# EAGLE board mosfetdriver_relay_boost (EAGLE 9.3.0)
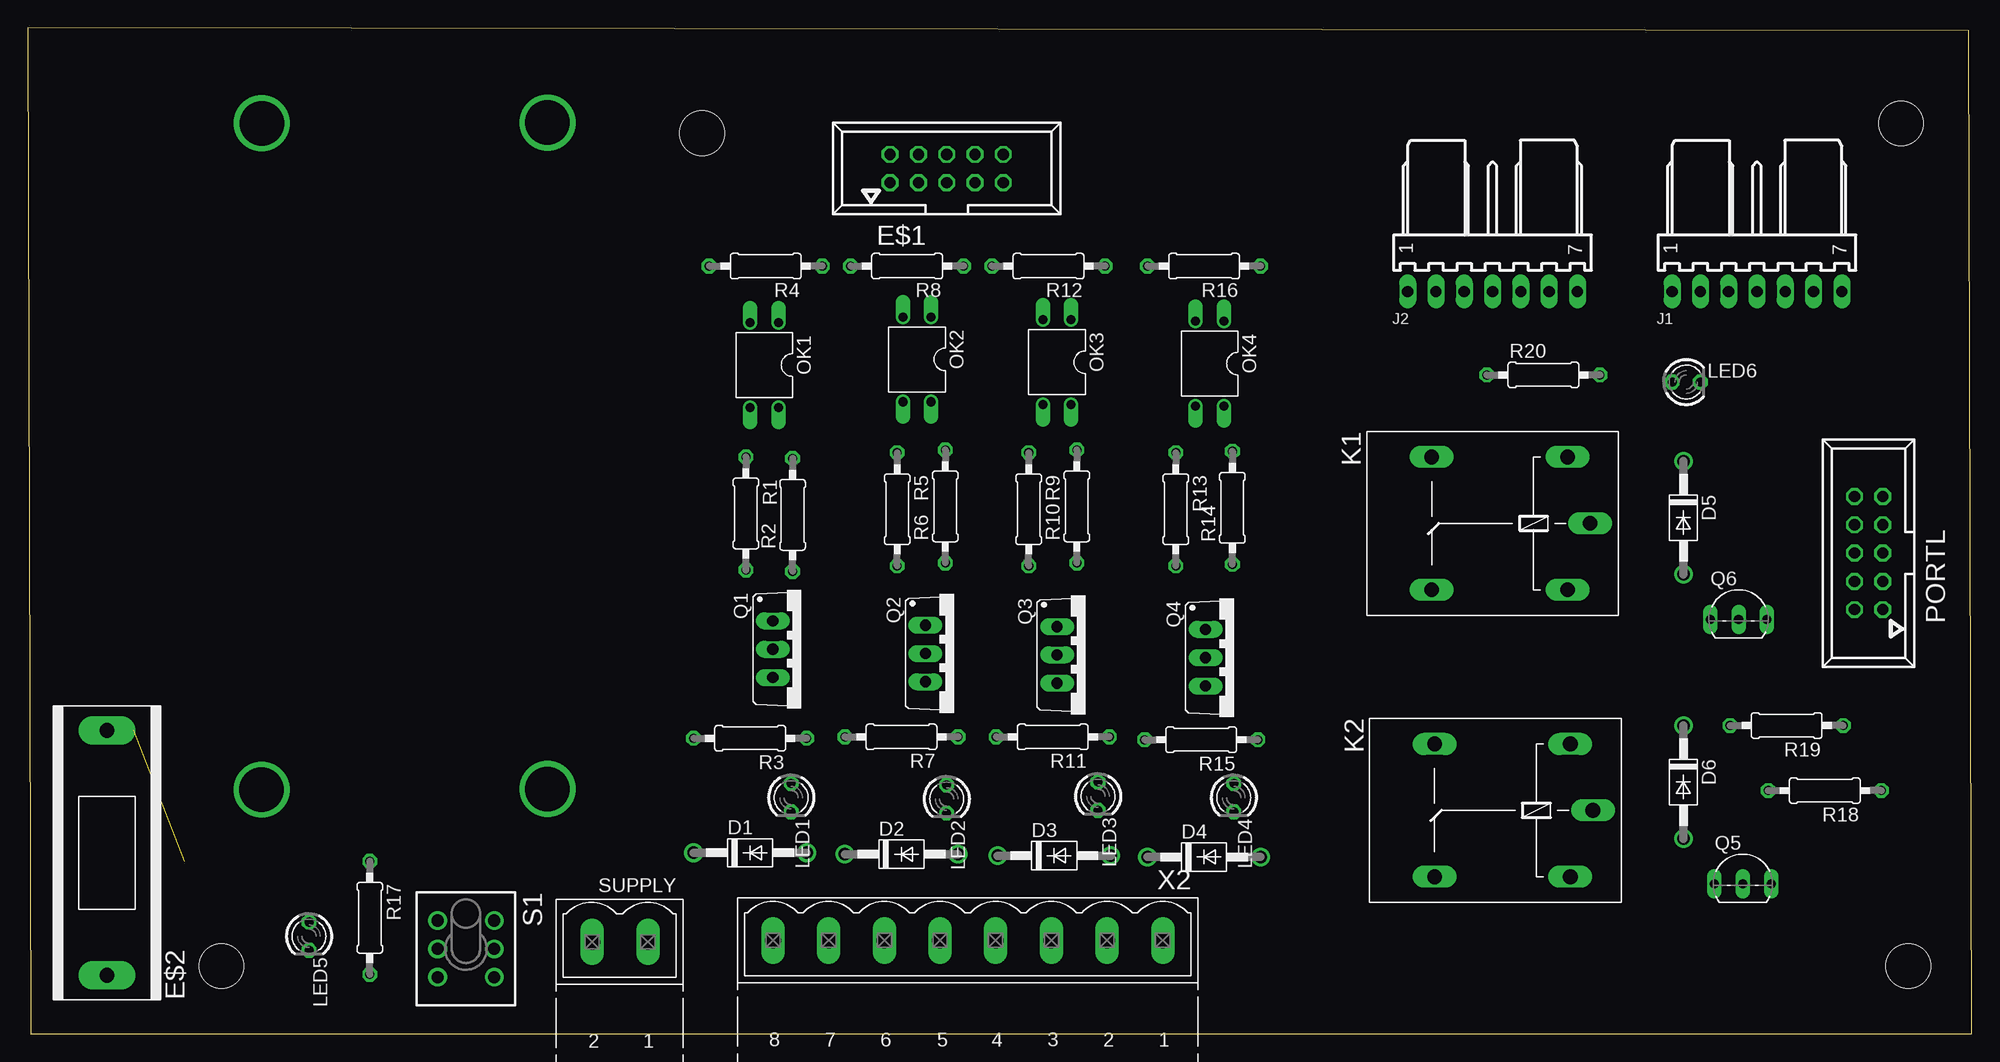
[diagram p0: board, top side]
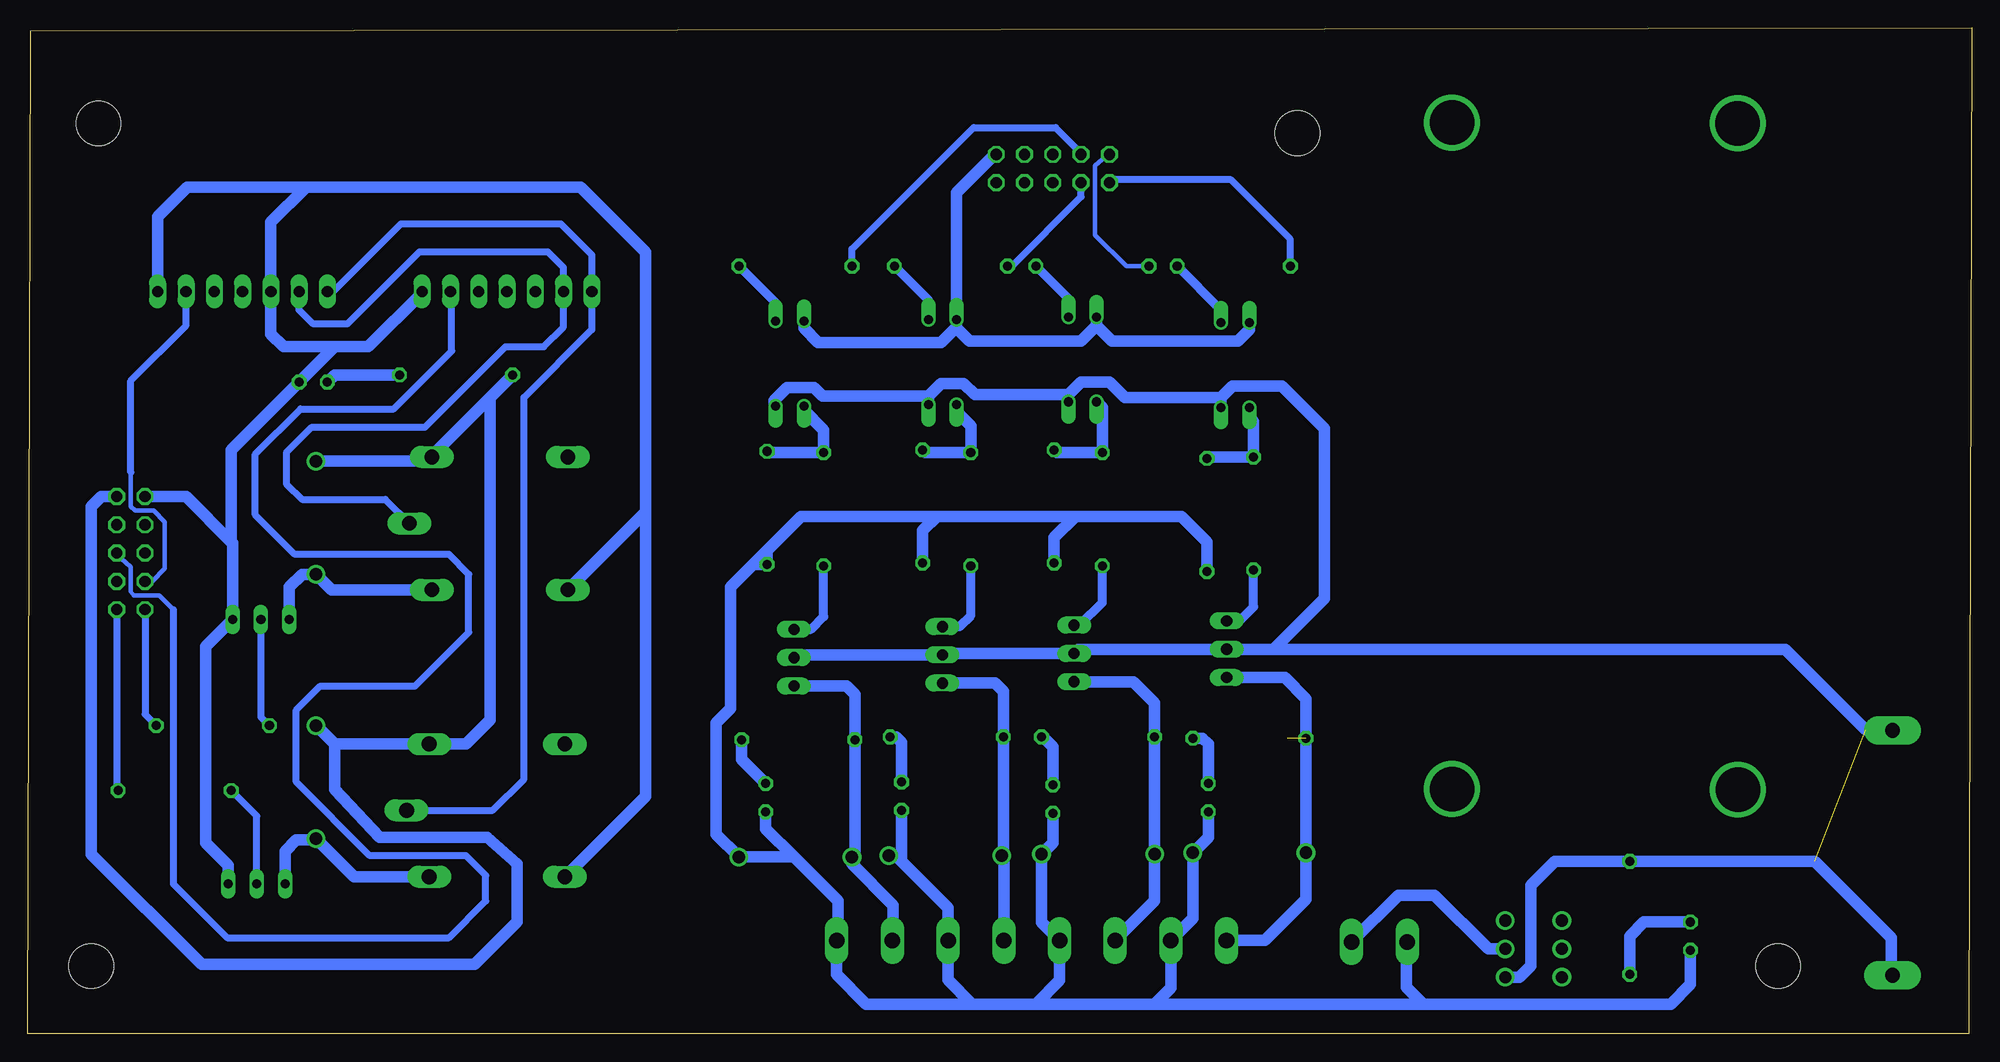
[diagram p1: board, bottom side, seen from below]

Size 174.58 x 90.36 mm. Coordinates in mm from the lower left corner, seen from the top.
Outline: 0.25,0.02 174.58,0 174.33,90.09 0,90.36 0.25,0.02
Copper layers (1*16): Top 0.035mm / dielectric 1.5mm / Bottom 0.035mm
Design rules "default *": minimum track width 10mil, minimum drill 24mil, track to track 8mil, track to pad 8mil, pad to pad 8mil, via to via 8mil, smd to smd 8mil, copper to edge 40mil, drill to drill 8mil, minimum pad ring 10mil, minimum via ring 8mil, stop-mask expansion 10mil, vias tented up to drill 0mil, thermal gap 10mil
Holes 4 mm at 168.25,81.79 168.89,6.1 17.38,6.1 60.56,80.9

## Footprints (pad centres in the part's own frame; a part is rotated, then mirrored left to right if it is on the bottom)
DO41-10 = drill 1.118: A 5.08,0; C -5.08,0
057-010-1 = drill 1 octagon: 1 -5.08,-1.27; 2 -5.08,1.27; 3 -2.54,-1.27; 4 -2.54,1.27; 5 0,-1.27; 6 0,1.27; 7 2.54,-1.27; 8 2.54,1.27; 9 5.08,-1.27; 10 5.08,1.27
SH22 = drill 1.321 pad 2.54 long: 1 -10.998,0; 2 10.998,0
7395-07 = drill 1.016 long: 1 7.62,0; 2 5.08,0; 3 2.54,0; 4 0,0; 5 -2.54,0; 6 -5.08,0; 7 -7.62,0
G5LE = drill 1.321 long: 1 -7.493,-5.969; 2 -7.493,5.969; O 4.699,5.969; P -9.525,0; S 4.699,-5.969
LED3MM = drill 0.813 octagon: A -1.27,0; K 1.27,0
DIL04 = drill 0.813 offset: 1 -1.27,-3.81; 2 1.27,-3.81; 3 1.27,3.81; 4 -1.27,3.81
TO220BV = drill 1.016 long: D 0,-2.54; G -2.54,-2.54; S 2.54,-2.54
TO92-EBC = drill 0.813 long: B 0,-1.27; C -2.54,-1.27; E 2.54,-1.27
0207/10 = drill 0.813 octagon: 1 -5.08,0; 2 5.08,0
TL4XPO = drill 1.1 pad 1.676: 1 -2.54,2.54; 2 0,2.54; 3 2.54,2.54; 4 -2.54,-2.54; 5 0,-2.54; 6 2.54,-2.54
MSTBV2 = drill 1.397 long: 1 -2.5,0; 2 2.5,0
MSTBV8 = drill 1.397 long: 1 -17.501,0; 2 -12.497,0; 3 -7.493,0; 4 -2.489,0; 5 2.515,0; 6 7.493,0; 7 12.497,0; 8 17.501,0

## Placement (x,y rotation side)
D1  1N4004  [DO41-10]  64.87,16.26 0 top
D2  1N4004  [DO41-10]  78.46,16.13 0 top
D3  1N4004  [DO41-10]  92.18,16 0 top
D4  1N4004  [DO41-10]  105.64,15.88 0 top
D5  1N4004  [DO41-10]  148.69,46.36 270 top
D6  1N4004  [DO41-10]  148.69,22.61 270 top
E$1  [057-010-1]  82.53,77.72 0 top
E$2  [SH22]  7.11,16.25 90 top
J1  22-05-7078-07  [7395-07]  155.3,66.67 180 top
J2  22-05-7078-07  [7395-07]  131.55,66.67 180 top
K1  G5L  [G5LE]  130.79,45.85 180 top
K2  G5L  [G5LE]  131.04,20.07 180 top
LED1  [LED3MM]  68.56,21.21 270 top
LED2  [LED3MM]  82.53,21.08 270 top
LED3  [LED3MM]  96.12,21.34 270 top
LED4  [LED3MM]  108.31,21.21 270 top
LED5  [LED3MM]  25.25,8.76 270 top
LED6  [LED3MM]  148.95,58.55 0 top
OK1  PC817  [DIL04]  66.14,60.07 180 top
OK2  PC817  [DIL04]  79.86,60.58 180 top
OK3  PC817  [DIL04]  92.43,60.33 180 top
OK4  PC817  [DIL04]  106.15,60.2 180 top
PORTL  057-010-1  [057-010-1]  165.33,43.18 90 top
Q1  IRF540  [TO220BV]  69.45,34.54 270 top
Q2  IRF540  [TO220BV]  83.16,34.16 270 top
Q3  IRF540  [TO220BV]  94.97,34.04 270 top
Q4  IRF540  [TO220BV]  108.31,33.78 270 top
Q5  BC548  [TO92-EBC]  154.03,14.73 0 top
Q6  BC548  [TO92-EBC]  153.65,38.48 0 top
R1  100  [0207/10]  64.49,46.74 270 top
R2  10k  [0207/10]  68.68,46.61 90 top
R3  1k  [0207/10]  64.87,26.54 180 top
R4  220  [0207/10]  66.27,68.96 180 top
R5  100  [0207/10]  78.08,47.12 270 top
R6  10k  [0207/10]  82.4,47.37 90 top
R7  1k  [0207/10]  78.46,26.67 180 top
R8  220  [0207/10]  78.97,68.96 180 top
R9  100  [0207/10]  89.89,47.12 270 top
R10  10k  [0207/10]  94.21,47.37 90 top
R11  1k  [0207/10]  92.05,26.67 180 top
R12  220  [0207/10]  91.67,68.96 180 top
R13  100  [0207/10]  103.1,47.12 270 top
R14  10k  [0207/10]  108.18,47.24 90 top
R15  1k  [0207/10]  105.39,26.42 180 top
R16  220  [0207/10]  105.64,68.96 180 top
R17  [0207/10]  30.71,10.41 270 top
R18  [0207/10]  161.39,21.84 180 top
R19  [0207/10]  157.97,27.69 180 top
R20  [0207/10]  136.12,59.18 0 top
S1  TL46PO  [TL4XPO]  39.35,7.62 270 top
SUPPLY  [MSTBV2]  53.19,8.26 180 top
X2  [MSTBV8]  84.43,8.38 180 top

## Library data of the parts
D1-D6 = diode
E$1 = con-panduit
E$2 = fuse
J1 J2 = con-molex; OC_FARNELL: unknown; OC_NEWARK: unknown
K1 K2 = relay; OC_FARNELL: unknown; OC_NEWARK: unknown
LED1-LED6 = led
OK1-OK4 = optocoupler; MPN: PC817X4J000F; OC_FARNELL: 9707727; OC_NEWARK: 97K7059
PORTL = con-panduit; OC_FARNELL: unknown; OC_NEWARK: unknown
Q1-Q4 = transistor-power
Q5 Q6 = transistor-npn
R1-R17 = rcl
R18-R20 = rcl; SPICEPREFIX: R
S1 = switch
SUPPLY X2 = con-phoenix-500; OC_FARNELL: unknown; OC_NEWARK: unknown

## Nets
12V: D5.C D6.C K1.1 K2.1 PORTL.9 R20.1
+12V: OK1.4 OK2.4 OK3.4 OK4.4 Q1.D Q2.D Q3.D Q4.D R17.1 S1.3
BRK: J1.1 J2.1 K2.P
DIR2: J2.3
EN: J1.2 J2.2 K1.P
GND: D1.A D2.A D3.A D4.A LED1.K LED2.K LED3.K LED4.K LED5.K R2.1 R6.1 R10.1 R14.1 SUPPLY.2 X2.1 X2.3 X2.5 X2.7
GND1: OK1.2 OK2.2 OK3.2 OK4.2
GND2: J1.3 J1.7 J2.7 K1.O K2.O LED6.K PORTL.10 Q5.E Q6.E
IN1: R4.2
IN2: R8.2
IN3: R12.2
IN4: R16.2
N$1: OK3.1 R12.1
N$2: OK1.3 R1.1 R2.2
N$3: Q1.G R1.2
N$4: PORTL.7
N$5: LED1.A R3.1
N$6: OK4.1 R16.1
N$7: OK2.3 R5.1 R6.2
N$8: Q2.G R5.2
N$9: Q6.B R19.2
N$10: LED2.A R7.1
N$11: OK2.1 R8.1
N$12: OK3.3 R9.1 R10.2
N$13: Q3.G R9.2
N$14: Q5.B R18.2
N$15: LED3.A R11.1
N$16: OK1.1 R4.1
N$17: OK4.3 R13.1 R14.2
N$18: Q4.G R13.2
N$19: D5.A K1.2 Q6.C
N$20: LED4.A R15.1
N$21: S1.2 SUPPLY.1
N$22: D6.A K2.2 Q5.C
N$23: LED5.A R17.2
N$24: LED6.A R20.2
OP1: D1.C Q1.S R3.2 X2.8
OP2: D2.C Q2.S R7.2 X2.6
OP3: D3.C Q3.S R11.2 X2.4
OP4: D4.C Q4.S R15.2 X2.2
P0: PORTL.1 R18.1
P1: PORTL.2 R19.1
PWM1: J1.6 PORTL.4
PWM3: J2.6 PORTL.5

## Tracks (layer width: path | path; a pad name or v marks a point on that pad's centre or on a via)
12V
  Bottom 1.016: K1.1 138.28,51.94 | 138.28,51.94 133.07,57.15 | 133.07,57.15 R20.1 | 133.07,57.15 133.07,28.19 135.23,26.04 K2.1 147.04,26.04 | D5.C 138.79,51.44 138.28,51.94 | 147.04,26.04 D6.C | 147.04,26.04 147.04,21.97 142.98,17.65 133.33,17.65 130.66,15.24 130.66,10.03 134.47,6.22 158.98,6.22 168.89,16.13 168.89,47.37 168,48.26 PORTL.9
+12V  (1 unrouted)
  Bottom 1.016: 62.72,34.54 58.14,39.12 58.14,54.36 61.95,58.17 66.4,58.17 67.41,57.15 | 62.72,34.54 Q1.D 80.24,34.54 Q2.D 92.31,34.16 Q3.D 105.51,34.04 Q4.D | 67.41,57.15 OK1.4 | 67.41,57.15 76.05,57.15 77.45,58.55 79.99,58.55 81.13,57.4 | 81.13,57.4 OK2.4 | 81.13,57.4 89.51,57.4 90.53,58.42 92.56,58.42 93.7,57.28 | OK3.4 93.7,57.28 | 93.7,57.28 103.23,57.28 103.99,58.04 106.4,58.04 107.55,56.9 107.55,56.52 OK4.4 | S1.3 40.62,5.08 39.6,6.1 39.6,13.33 37.44,15.49 R17.1 14.07,15.49 9.5,10.92 9.5,10.91 7.67,9.08 7.67,9.06 7.22,8.61 7.22,5.29 7.11,5.18 | 62.72,34.54 16.74,34.54 9.5,27.3 7.2,27.3 7,27.11
BRK
  Bottom 0.61: K2.P 132.82,20.07 130.03,22.86 130.03,57.15 123.93,63.25 J2.1 123.93,69.98 126.72,72.77 141.07,72.77 147.17,66.67 J1.1
EN
  Bottom 0.61: K1.P 142.47,48.01 149.96,48.01 151.36,49.4 151.36,52.2 149.07,54.48 138.91,54.48 131.68,61.72 128.25,61.72 126.47,63.5 J2.2 126.47,68.83 127.87,70.23 139.42,70.23 145.9,63.75 148.95,63.75 150.22,65.02 J1.2
GND
  Bottom 1.016: D3.A 96.62,16 96.12,15.49 | 96.12,15.49 91.93,11.3 X2.3 91.93,4.83 89.77,2.67 | 105.77,15.88 D4.A 112.75,17.91 112.75,27.94 111.48,29.21 111.48,40.13 109.45,42.16 | 105.77,15.88 101.83,11.94 101.83,8.48 X2.1 101.96,8.36 101.96,5.33 99.29,2.67 89.77,2.67 | LED4.K 108.31,18.41 105.77,15.88 | LED3.K 96.12,15.49 | LED2.K 82.53,17.15 D2.A 83.54,10.01 X2.5 81.92,4.8 84.05,2.67 | LED1.K 68.56,17.65 D1.A 69.95,10.36 X2.7 71.94,4.12 73.38,2.67 | 109.45,42.16 R14.1 108.18,43.05 108.37,43.24 | R2.1 68.68,44.2 70.97,46.48 80.5,46.48 | 80.5,46.48 92.94,46.48 | 92.94,46.48 105.13,46.48 108.37,43.24 | 108.37,43.24 109.45,42.16 | R10.1 94.21,45.21 92.94,46.48 | R6.1 82.4,44.58 80.5,46.48 | LED5.K 25.25,4.45 27.03,2.67 49.25,2.67 | 49.25,2.67 50.78,4.19 50.78,8.17 SUPPLY.2 | 84.05,2.67 89.77,2.67 | 73.38,2.67 84.05,2.67 | 73.38,2.67 49.25,2.67
GND1
  Bottom 1.016: OK1.2 64.87,63.25 65.89,62.23 77.19,62.23 78.59,63.63 | OK2.2 78.59,63.63 | 78.59,63.63 79.99,62.23 90.02,62.23 91.16,63.37 OK3.2 | OK3.2 91.16,63.5 92.56,62.1 103.61,62.1 104.88,63.37 OK4.2 | OK3.2 91.16,75.56 87.73,78.99
GND2
  Bottom 1.016: J2.7 139.17,66.55 144,61.72 147.04,61.72 | 147.04,61.72 LED6.K 156.31,52.45 156.31,44.2 | 147.04,61.72 151.61,61.72 152.76,62.86 J1.3 152.76,72.9 149.58,76.07 | J1.7 162.92,73.41 160.25,76.07 149.58,76.07 | 149.58,76.07 124.94,76.07 119.1,70.23 119.1,46.86 | 119.1,46.86 K1.O | 119.1,46.86 119.1,21.34 K2.O | Q5.E 156.57,15.11 158.6,17.15 158.6,34.8 Q6.E 156.19,44.07 156.31,44.2 | 156.31,44.2 160.38,48.26 PORTL.10
IN1
  Bottom 0.61: R4.2 61.19,71.37 66.53,76.71 77.19,76.71 77.45,76.45
IN2
  Bottom 0.406: R8.2 75.92,68.96 78.72,71.75 78.72,77.98 77.45,79.12
IN3
  Bottom 0.61: 86.72,69.09 R12.2 86.21,68.96 79.99,75.18 79.99,76.45
IN4
  Bottom 0.61: R16.2 100.56,70.48 89.64,81.41 82.27,81.41 79.99,79.12
N$1
  Bottom 0.813: OK3.1 93.7,65.91 R12.1
N$2
  Bottom 1.016: OK1.3 64.87,55.37 64.49,54.99 R1.1 68.18,51.82 R2.2
N$3
  Bottom 0.813: Q1.G 65.76,37.08 64.49,38.35 R1.2
N$5
  Bottom 1.016: R3.1 69.06,26.54 68.56,26.04 LED1.A
N$6
  Bottom 0.813: OK4.1 107.42,65.66 R16.1
N$7
  Bottom 0.61: 77.95,52.71 R5.1 | R6.2 82.15,52.2
  Bottom 1.016: OK2.3 78.08,56.26 R5.1 82.15,52.2 R6.2
N$8
  Bottom 0.813: Q2.G 80.11,36.7 78.08,38.73 R5.2
N$9
  Bottom 0.61: Q6.B 153.65,28.45 R19.2
N$10
  Bottom 1.016: R7.1 83.42,26.67 82.53,25.78 LED2.A
N$11
  Bottom 0.813: OK2.1 81.13,66.04 R8.1
N$12
  Bottom 1.016: 90.02,52.2 R9.1 | 90.02,52.2 93.96,52.2 R10.2 | OK3.3 91.16,55.88 89.89,54.61 89.89,52.32 90.02,52.2
N$13
  Bottom 0.813: Q3.G 90.91,36.58 89.89,37.59 R9.2
N$14
  Bottom 0.61: Q5.B 154.03,19.56 R18.2
N$15
  Bottom 1.016: R11.1 96.62,26.67 96.12,26.16 LED3.A
N$16
  Bottom 0.813: OK1.1 67.41,65.02 R4.1
N$17
  Bottom 1.016: OK4.3 104.88,56.01 103.1,54.23 R13.1 108.05,52.2 R14.2
N$18
  Bottom 0.813: Q4.G 104.24,36.32 103.1,37.47 R13.2
N$19
  Bottom 1.016: K1.2 147.3,39.88 D5.A 149.96,41.27 151.11,40.13 Q6.C
N$20
  Bottom 1.016: R15.1 110.47,24.64 LED4.A
N$21
  Bottom 1.016: S1.2 43.41,7.62 48.24,12.45 51.5,12.45 SUPPLY.1
N$22
  Bottom 1.016: K2.2 145.26,14.1 D6.A 148.82,17.4 150.47,17.4 151.49,16.38 Q5.C
N$23
  Bottom 1.016: LED5.A 29.44,10.03 30.71,8.76 R17.2
N$24
  Bottom 1.016: R20.2 147.04,59.18 LED6.A
OP1  (1 unrouted)
  Bottom 1.016: X2.8 63.48,8.38 59.79,12.06 D1.C R3.2 59.79,30.1 61.7,32 Q1.S
OP2
  Bottom 1.016: X2.6 73.38,11.94 D2.C R7.2 73.38,29.72 75.29,31.62 Q2.S
OP3
  Bottom 0.61: D3.C 86.92,15.82
  Bottom 1.016: X2.4 86.92,15.82 D3.C 86.97,16.13 R11.2 86.97,30.73 87.73,31.5 Q3.S
OP4
  Bottom 1.016: X2.2 96.88,8.43 96.88,11.56 100.56,15.24 D4.C 100.31,16.13 R15.2 100.31,30.48 101.07,31.24 Q4.S
P0
  Bottom 0.61: PORTL.1 166.6,21.97 R18.1
P1
  Bottom 0.61: PORTL.2 164.06,28.7 R19.1
PWM1
  Bottom 0.406: PORTL.4 163.43,40.64 162.28,41.78 162.28,45.97 163.3,46.99 164.95,46.99 165.33,47.37 165.33,50.42
  Bottom 0.61: 165.33,50.42 165.33,58.67 160.38,63.63 J1.6
PWM3
  Bottom 0.406: PORTL.5 166.6,43.05 165.33,41.91 165.33,39.75 165.08,39.37 162.79,39.37 161.52,38.1
  Bottom 0.61: 161.52,38.1 161.52,13.46 156.69,8.64 136.76,8.64 133.45,11.94 133.45,14.22 135.23,16 143.87,16 150.47,22.61 150.47,29.08 148.31,31.24 139.8,31.24 134.98,36.07 134.98,41.27 136.76,43.05 150.6,43.05 154.16,46.61 154.16,52.07 150.09,56.13 141.71,56.13 136.5,61.34 136.5,66.55 J2.6
S$1  (via drill 4)
  other vias: 21.01,81.79
S$2  (via drill 4)
  other vias: 46.67,81.86
S$3  (via drill 4)
  other vias: 20.99,21.93
S$4  (via drill 4)
  other vias: 46.67,21.99